# EAGLE board Sno_Shoe-Panel (EAGLE 9.6.2), part 1 of 4
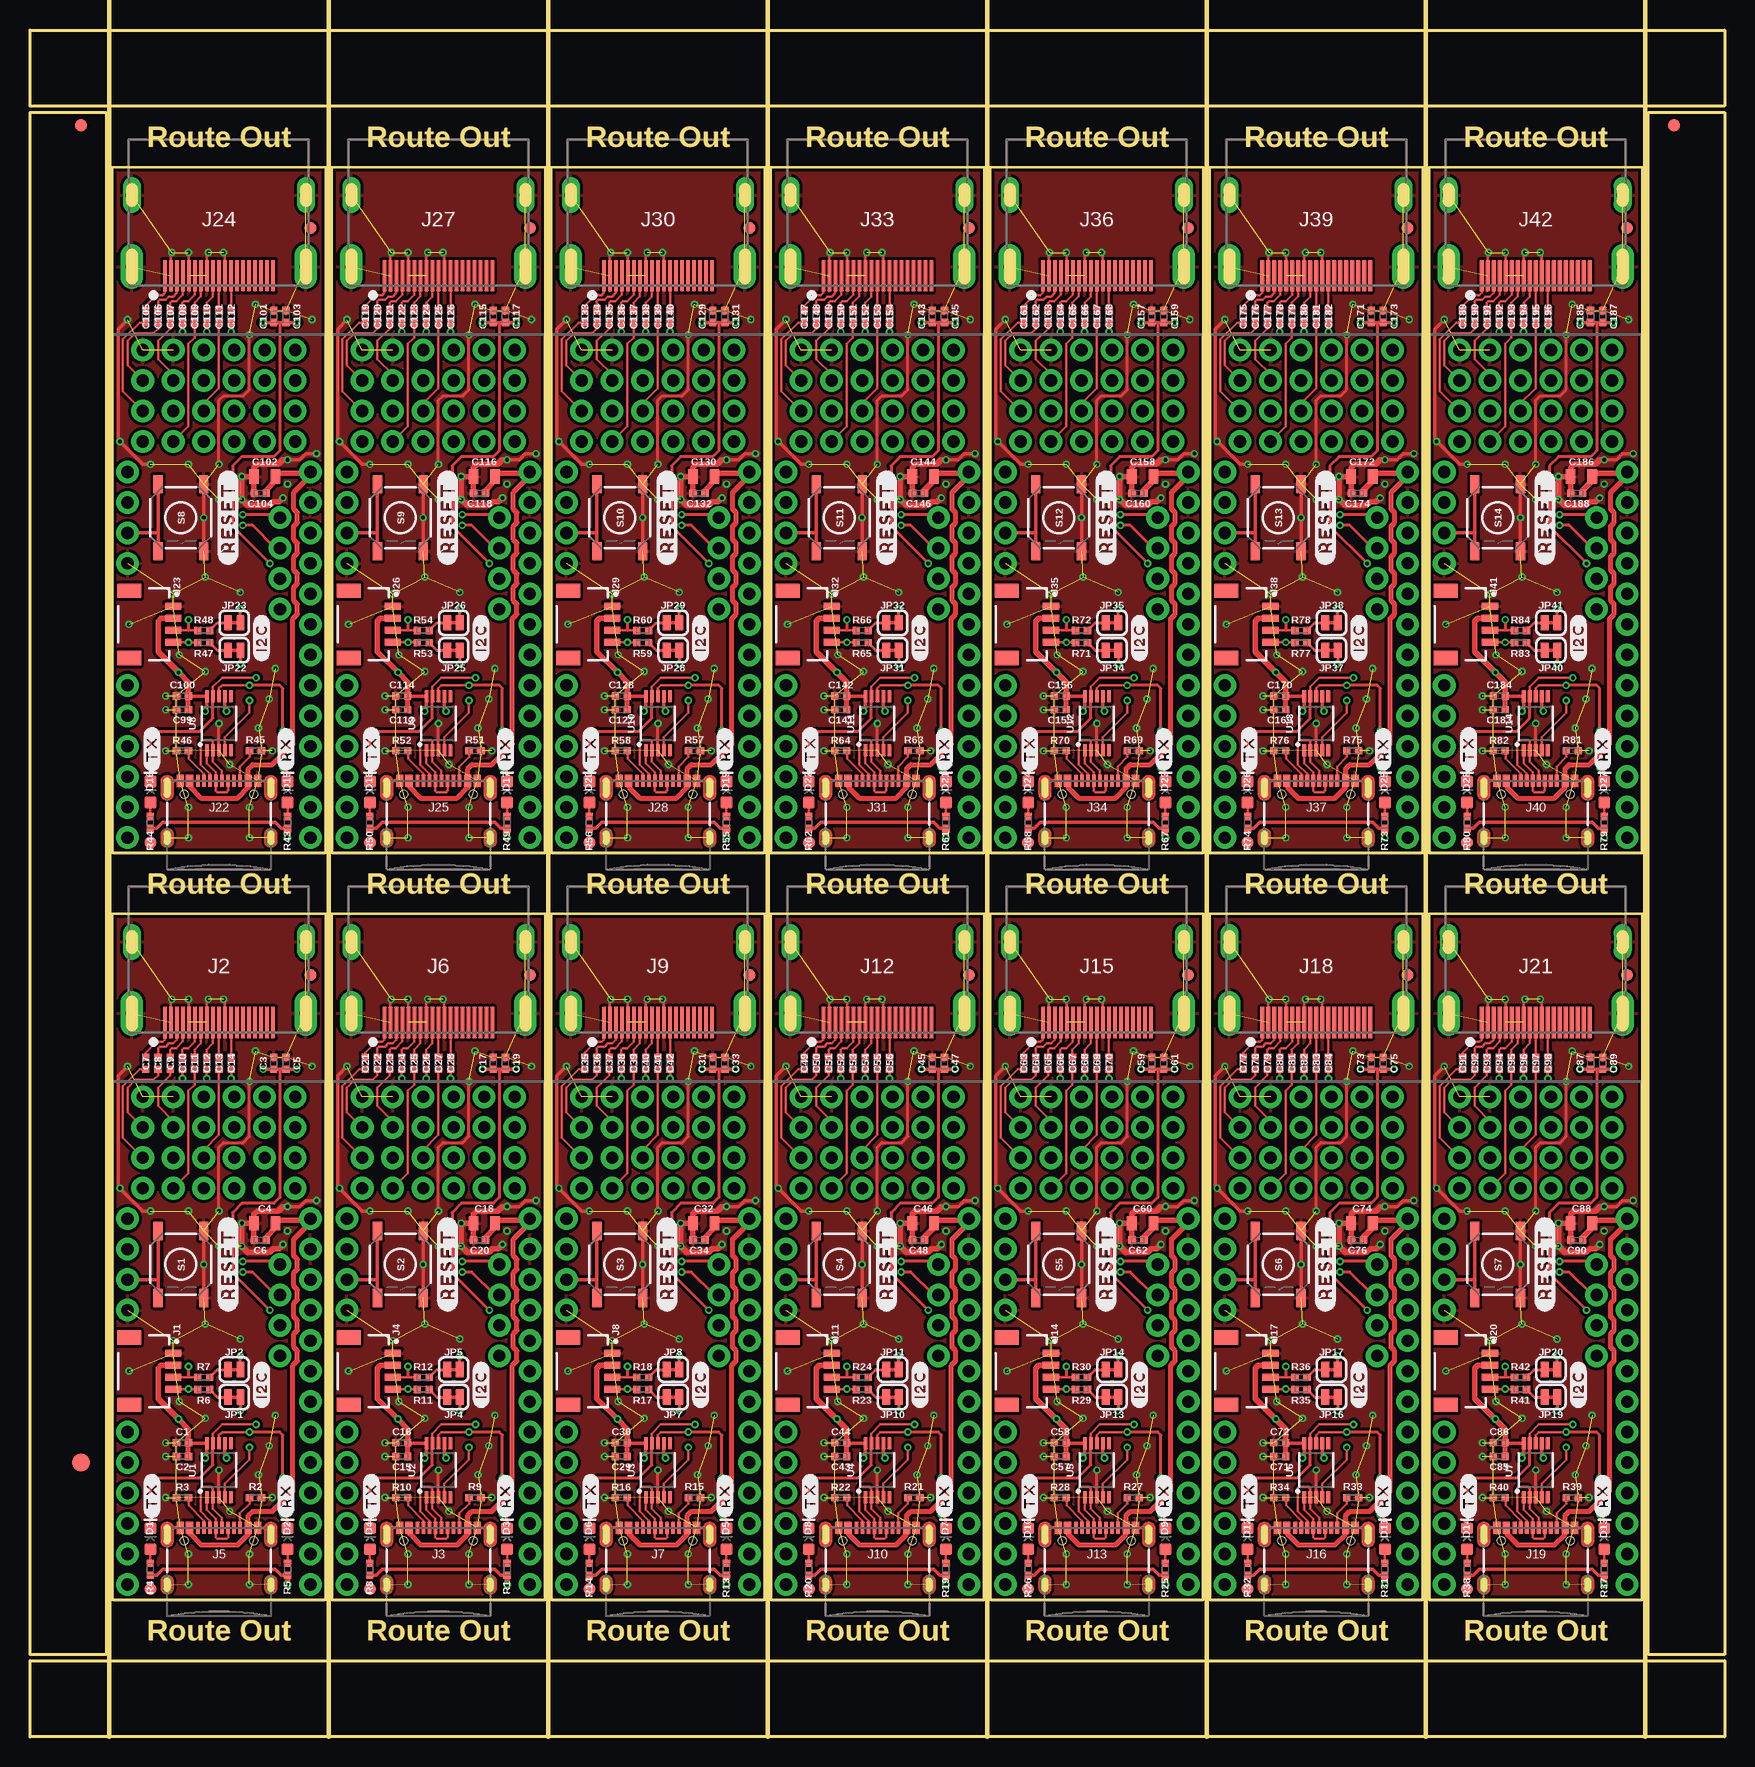
[diagram p0: board, top side]
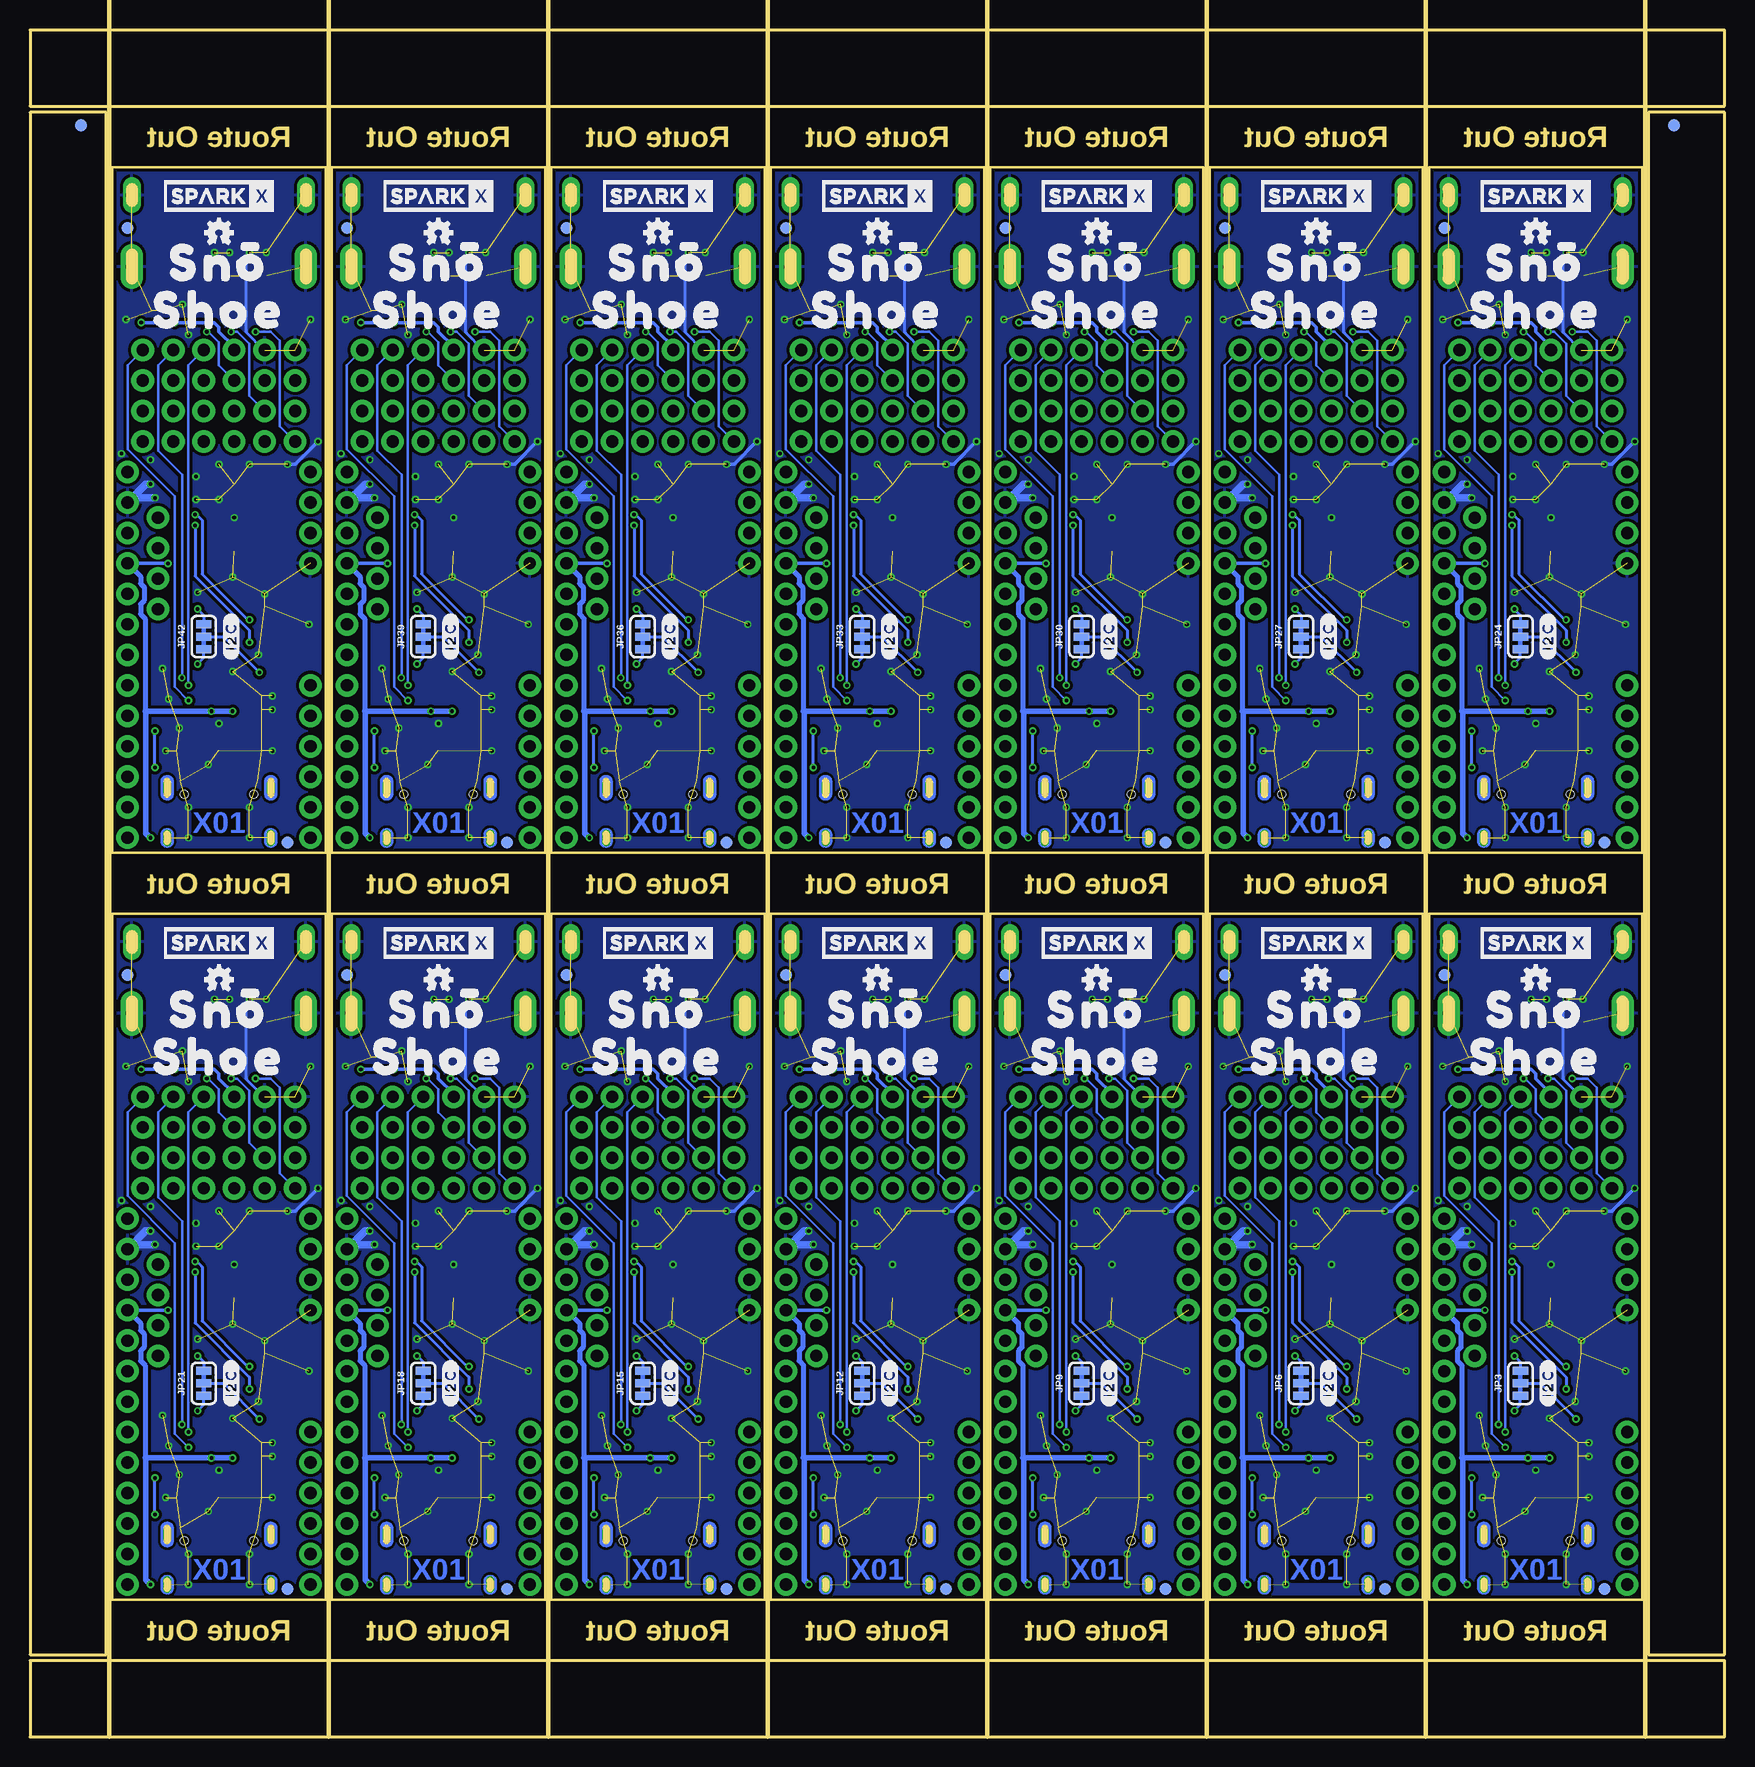
[diagram p1: board, bottom side, seen from below]

Size 141.22 x 142.24 mm. Coordinates in mm from the lower left corner, seen from the top.
Outline: 6.86,11.43 24.64,11.43 24.64,68.58 6.86,68.58 6.86,11.43
Outline: 25.15,11.43 42.93,11.43 42.93,68.58 25.15,68.58 25.15,11.43
Outline: 43.43,11.43 61.21,11.43 61.21,68.58 43.43,68.58 43.43,11.43
Outline: 61.72,11.43 79.5,11.43 79.5,68.58 61.72,68.58 61.72,11.43
Outline: 80.01,11.43 97.79,11.43 97.79,68.58 80.01,68.58 80.01,11.43
Outline: 98.3,11.43 116.08,11.43 116.08,68.58 98.3,68.58 98.3,11.43
Outline: 116.59,11.43 134.37,11.43 134.37,68.58 116.59,68.58 116.59,11.43
Outline: 6.86,73.66 24.64,73.66 24.64,130.81 6.86,130.81 6.86,73.66
Outline: 25.15,73.66 42.93,73.66 42.93,130.81 25.15,130.81 25.15,73.66
Outline: 43.43,73.66 61.21,73.66 61.21,130.81 43.43,130.81 43.43,73.66
Outline: 61.72,73.66 79.5,73.66 79.5,130.81 61.72,130.81 61.72,73.66
Outline: 80.01,73.66 97.79,73.66 97.79,130.81 80.01,130.81 80.01,73.66
Outline: 98.3,73.66 116.08,73.66 116.08,130.81 98.3,130.81 98.3,73.66
Outline: 116.59,73.66 134.37,73.66 134.37,130.81 116.59,130.81 116.59,73.66
Outline: 0,6.35 141.22,6.35 141.22,0 0,0 0,6.35
Outline: 134.87,135.38 141.22,135.38 141.22,6.86 134.87,6.86 134.87,135.38
Outline: 0,142.24 141.22,142.24 141.22,135.89 0,135.89 0,142.24
Outline: 0,135.38 6.35,135.38 6.35,6.86 0,6.86 0,135.38
Copper layers (1*16): Top 0.035mm / dielectric 1.5mm / Bottom 0.035mm
Design rules "Sno_Shoe": minimum track width 6mil, minimum drill 0.3mm, track to track 6mil, track to pad 6mil, pad to pad 6mil, via to via 6mil, smd to smd 6mil, copper to edge 6mil, drill to drill 6mil, minimum pad ring 6mil, minimum via ring 6mil, stop-mask expansion 4mil, vias tented up to drill 25mil, thermal gap 10mil
Net classes: 1 Power: width 0.406 mm
Milling: 8 lines

## Footprints (pad centres in the part's own frame; a part is rotated, then mirrored left to right if it is on the bottom)
0402-TIGHT = smd 0.6 x 0.6: 1 -0.5,0; 2 0.5,0
0805 = smd 0.8 x 1.2: 1 -0.9,0; 2 0.9,0
LED-0603 = smd 1 x 1: A -0.877,0; C 0.877,0
FIDUCIAL-1X2 = smd 1 x 1: 1 0,0
FIDUCIAL-1.5X3 = smd 1.5 x 1.5: 1 0,0
JST04_1MM_RA = smd 0.6 x 1.35: 1 -1.5,0; 2 -0.5,0; 3 0.5,0; 4 1.5,0 | smd 1.2 x 2: NC1 2.8,-3.675; NC2 -2.8,-3.675
MOLEX_HDMI_208658-1051 = smd 0.3 x 2.6: 1 4.5,5.235; 2 4,5.235; 3 3.5,5.235; 4 3,5.235; 5 2.5,5.235; 6 2,5.235; 7 1.5,5.235; 8 1,5.235; 9 0.5,5.235; 10 0,5.235; 11 -0.5,5.235; 12 -1,5.235; 13 -1.5,5.235; 14 -2,5.235; 15 -2.5,5.235; 16 -3,5.235; 17 -3.5,5.235; 18 -4,5.235; 19 -4.5,5.235 | drill 1 pad 1.875 long: MH1 -7.25,4.475; MH2 7.25,4.475 | drill 1 long: MH3 -7.25,-1.485; MH4 7.25,-1.485
USB-C-16P_4LAYER-PADS = smd 0.3 x 1: A5 -1.25,-0.34; A6 -0.25,-0.34; A7 0.25,-0.34; A8 1.25,-0.34; B5 1.75,-0.34; B6 0.75,-0.34; B7 -0.75,-0.34; B8 -1.75,-0.34 | smd 0.6 x 1: GND -3.225,-0.34; GND2 3.225,-0.34; VBUS1 -2.45,-0.34; VBUS2 2.45,-0.34 | drill 0.4 pad 0.6 long: SHLD1 -4.318,-0.915; SHLD2 4.318,-0.915; SHLD3 -4.318,-5.095; SHLD4 4.318,-5.095 | hole 0.65: -2.89,-1.445; 2.89,-1.445
SMT-JUMPER_2_NC_TRACE_SILK = smd 0.66 x 1.27: 1 -0.521,0; 2 0.521,0
SMT-JUMPER_3_2-NC_TRACE_SILK = smd 0.66 x 1.27: 1 -1.041,0; 2 0,0; 3 1.041,0
TACTILE_SWITCH_SMD_5.2MM = smd 1.524 x 0.762: 1 -2.794,1.905; 2 2.794,1.905; 3 -2.794,-1.905; 4 2.794,-1.905
MSOP10 = smd 1 x 0.3: 1 -2.25,1; 2 -2.25,0.5; 3 -2.25,0; 4 -2.25,-0.5; 5 -2.25,-1; 6 2.25,-1; 7 2.25,-0.5; 8 2.25,0; 9 2.25,0.5; 10 2.25,1
SNO_MISSING_PINS = drill 1.016 pad 1.88: P$1 10.16,7.62; P$2 7.62,7.62; P$3 5.08,7.62; P$4 2.54,7.62; P$8 -7.62,7.62; P$9 -10.16,7.62; P$10 -12.7,7.62; P$11 -15.24,7.62; P$12 -17.78,7.62; P$13 -20.32,7.62; P$19 -20.32,-7.62; P$20 -17.78,-7.62; P$21 -15.24,-7.62; P$22 -12.7,-7.62; P$23 -10.16,-7.62; P$24 -7.62,-7.62; P$25 -5.08,-7.62; P$26 -2.54,-7.62; P$27 0,-7.62; P$28 2.54,-7.62; P$29 5.08,-7.62; P$30 7.62,-7.62; P$31 10.16,-7.62; P$32 -1.27,-5.08; P$33 1.27,-5.08; P$34 3.81,-5.08; P$35 6.35,-5.08; P$36 12.7,6.35; P$37 12.7,3.81; P$38 12.7,1.27; P$39 12.7,-1.27; P$40 12.7,-3.81; P$41 12.7,-6.35; P$42 15.24,6.35; P$43 15.24,3.81; P$44 15.24,1.27; P$45 15.24,-1.27; P$46 15.24,-3.81; P$47 15.24,-6.35; P$48 17.78,6.35; P$49 17.78,3.81; P$50 17.78,1.27; P$51 17.78,-1.27; P$52 17.78,-3.81; P$53 17.78,-6.35; P$54 20.32,6.35; P$55 20.32,3.81; P$56 20.32,1.27; P$57 20.32,-1.27; P$58 20.32,-3.81; P$59 20.32,-6.35

## Placement (x,y rotation side)
C1  0.1uF  [0402-TIGHT]  12.7,24.51 180 top
C2  10nF  [0402-TIGHT]  12.7,23.37 180 top
C3  10uF  [0402-TIGHT]  20.32,56.13 90 top
C4  10uF  [0805]  19.56,42.8 180 top
C5  0.1uF  [0402-TIGHT]  21.34,56.13 90 top
C6  0.1uF  [0402-TIGHT]  19.18,41.4 180 top
C7  0.1uF  [0402-TIGHT]  9.65,56.13 90 top
C8  0.1uF  [0402-TIGHT]  10.67,56.13 90 top
C9  0.1uF  [0402-TIGHT]  11.68,56.13 90 top
C10  0.1uF  [0402-TIGHT]  12.7,56.13 90 top
C11  0.1uF  [0402-TIGHT]  13.72,56.13 90 top
C12  0.1uF  [0402-TIGHT]  14.73,56.13 90 top
C13  0.1uF  [0402-TIGHT]  15.75,56.13 90 top
C14  0.1uF  [0402-TIGHT]  16.76,56.13 90 top
C15  10nF  [0402-TIGHT]  30.99,23.37 180 top
C16  0.1uF  [0402-TIGHT]  30.99,24.51 180 top
C17  10uF  [0402-TIGHT]  38.61,56.13 90 top
C18  10uF  [0805]  37.85,42.8 180 top
C19  0.1uF  [0402-TIGHT]  39.62,56.13 90 top
C20  0.1uF  [0402-TIGHT]  37.46,41.4 180 top
C21  0.1uF  [0402-TIGHT]  27.94,56.13 90 top
C22  0.1uF  [0402-TIGHT]  28.96,56.13 90 top
C23  0.1uF  [0402-TIGHT]  29.97,56.13 90 top
C24  0.1uF  [0402-TIGHT]  30.99,56.13 90 top
C25  0.1uF  [0402-TIGHT]  32,56.13 90 top
C26  0.1uF  [0402-TIGHT]  33.02,56.13 90 top
C27  0.1uF  [0402-TIGHT]  34.04,56.13 90 top
C28  0.1uF  [0402-TIGHT]  35.05,56.13 90 top
C29  10nF  [0402-TIGHT]  49.28,23.37 180 top
C30  0.1uF  [0402-TIGHT]  49.28,24.51 180 top
C31  10uF  [0402-TIGHT]  56.9,56.13 90 top
C32  10uF  [0805]  56.13,42.8 180 top
C33  0.1uF  [0402-TIGHT]  57.91,56.13 90 top
C34  0.1uF  [0402-TIGHT]  55.75,41.4 180 top
C35  0.1uF  [0402-TIGHT]  46.23,56.13 90 top
C36  0.1uF  [0402-TIGHT]  47.24,56.13 90 top
C37  0.1uF  [0402-TIGHT]  48.26,56.13 90 top
C38  0.1uF  [0402-TIGHT]  49.28,56.13 90 top
C39  0.1uF  [0402-TIGHT]  50.29,56.13 90 top
C40  0.1uF  [0402-TIGHT]  51.31,56.13 90 top
C41  0.1uF  [0402-TIGHT]  52.32,56.13 90 top
C42  0.1uF  [0402-TIGHT]  53.34,56.13 90 top
C43  10nF  [0402-TIGHT]  67.56,23.37 180 top
C44  0.1uF  [0402-TIGHT]  67.56,24.51 180 top
C45  10uF  [0402-TIGHT]  75.18,56.13 90 top
C46  10uF  [0805]  74.42,42.8 180 top
C47  0.1uF  [0402-TIGHT]  76.2,56.13 90 top
C48  0.1uF  [0402-TIGHT]  74.04,41.4 180 top
C49  0.1uF  [0402-TIGHT]  64.52,56.13 90 top
C50  0.1uF  [0402-TIGHT]  65.53,56.13 90 top
C51  0.1uF  [0402-TIGHT]  66.55,56.13 90 top
C52  0.1uF  [0402-TIGHT]  67.56,56.13 90 top
C53  0.1uF  [0402-TIGHT]  68.58,56.13 90 top
C54  0.1uF  [0402-TIGHT]  69.6,56.13 90 top
C55  0.1uF  [0402-TIGHT]  70.61,56.13 90 top
C56  0.1uF  [0402-TIGHT]  71.63,56.13 90 top
C57  10nF  [0402-TIGHT]  85.85,23.37 180 top
C58  0.1uF  [0402-TIGHT]  85.85,24.51 180 top
C59  10uF  [0402-TIGHT]  93.47,56.13 90 top
C60  10uF  [0805]  92.71,42.8 180 top
C61  0.1uF  [0402-TIGHT]  94.49,56.13 90 top
C62  0.1uF  [0402-TIGHT]  92.33,41.4 180 top
C63  0.1uF  [0402-TIGHT]  82.8,56.13 90 top
C64  0.1uF  [0402-TIGHT]  83.82,56.13 90 top
C65  0.1uF  [0402-TIGHT]  84.84,56.13 90 top
C66  0.1uF  [0402-TIGHT]  85.85,56.13 90 top
C67  0.1uF  [0402-TIGHT]  86.87,56.13 90 top
C68  0.1uF  [0402-TIGHT]  87.88,56.13 90 top
C69  0.1uF  [0402-TIGHT]  88.9,56.13 90 top
C70  0.1uF  [0402-TIGHT]  89.92,56.13 90 top
C71  10nF  [0402-TIGHT]  104.14,23.37 180 top
C72  0.1uF  [0402-TIGHT]  104.14,24.51 180 top
C73  10uF  [0402-TIGHT]  111.76,56.13 90 top
C74  10uF  [0805]  111,42.8 180 top
C75  0.1uF  [0402-TIGHT]  112.78,56.13 90 top
C76  0.1uF  [0402-TIGHT]  110.62,41.4 180 top
C77  0.1uF  [0402-TIGHT]  101.09,56.13 90 top
C78  0.1uF  [0402-TIGHT]  102.11,56.13 90 top
C79  0.1uF  [0402-TIGHT]  103.12,56.13 90 top
C80  0.1uF  [0402-TIGHT]  104.14,56.13 90 top
C81  0.1uF  [0402-TIGHT]  105.16,56.13 90 top
C82  0.1uF  [0402-TIGHT]  106.17,56.13 90 top
C83  0.1uF  [0402-TIGHT]  107.19,56.13 90 top
C84  0.1uF  [0402-TIGHT]  108.2,56.13 90 top
C85  10nF  [0402-TIGHT]  122.43,23.37 180 top
C86  0.1uF  [0402-TIGHT]  122.43,24.51 180 top
C87  10uF  [0402-TIGHT]  130.05,56.13 90 top
C88  10uF  [0805]  129.29,42.8 180 top
C89  0.1uF  [0402-TIGHT]  131.06,56.13 90 top
C90  0.1uF  [0402-TIGHT]  128.91,41.4 180 top
C91  0.1uF  [0402-TIGHT]  119.38,56.13 90 top
C92  0.1uF  [0402-TIGHT]  120.4,56.13 90 top
C93  0.1uF  [0402-TIGHT]  121.41,56.13 90 top
C94  0.1uF  [0402-TIGHT]  122.43,56.13 90 top
C95  0.1uF  [0402-TIGHT]  123.44,56.13 90 top
C96  0.1uF  [0402-TIGHT]  124.46,56.13 90 top
C97  0.1uF  [0402-TIGHT]  125.48,56.13 90 top
C98  0.1uF  [0402-TIGHT]  126.49,56.13 90 top
C99  10nF  [0402-TIGHT]  12.7,85.6 180 top
C100  0.1uF  [0402-TIGHT]  12.7,86.74 180 top
C101  10uF  [0402-TIGHT]  20.32,118.36 90 top
C102  10uF  [0805]  19.56,105.03 180 top
C103  0.1uF  [0402-TIGHT]  21.34,118.36 90 top
C104  0.1uF  [0402-TIGHT]  19.18,103.63 180 top
C105  0.1uF  [0402-TIGHT]  9.65,118.36 90 top
C106  0.1uF  [0402-TIGHT]  10.67,118.36 90 top
C107  0.1uF  [0402-TIGHT]  11.68,118.36 90 top
C108  0.1uF  [0402-TIGHT]  12.7,118.36 90 top
C109  0.1uF  [0402-TIGHT]  13.72,118.36 90 top
C110  0.1uF  [0402-TIGHT]  14.73,118.36 90 top
C111  0.1uF  [0402-TIGHT]  15.75,118.36 90 top
C112  0.1uF  [0402-TIGHT]  16.76,118.36 90 top
C113  10nF  [0402-TIGHT]  30.99,85.6 180 top
C114  0.1uF  [0402-TIGHT]  30.99,86.74 180 top
C115  10uF  [0402-TIGHT]  38.61,118.36 90 top
C116  10uF  [0805]  37.85,105.03 180 top
C117  0.1uF  [0402-TIGHT]  39.62,118.36 90 top
C118  0.1uF  [0402-TIGHT]  37.46,103.63 180 top
C119  0.1uF  [0402-TIGHT]  27.94,118.36 90 top
C120  0.1uF  [0402-TIGHT]  28.96,118.36 90 top
C121  0.1uF  [0402-TIGHT]  29.97,118.36 90 top
C122  0.1uF  [0402-TIGHT]  30.99,118.36 90 top
C123  0.1uF  [0402-TIGHT]  32,118.36 90 top
C124  0.1uF  [0402-TIGHT]  33.02,118.36 90 top
C125  0.1uF  [0402-TIGHT]  34.04,118.36 90 top
C126  0.1uF  [0402-TIGHT]  35.05,118.36 90 top
C127  10nF  [0402-TIGHT]  49.28,85.6 180 top
C128  0.1uF  [0402-TIGHT]  49.28,86.74 180 top
C129  10uF  [0402-TIGHT]  56.9,118.36 90 top
C130  10uF  [0805]  56.13,105.03 180 top
C131  0.1uF  [0402-TIGHT]  57.91,118.36 90 top
C132  0.1uF  [0402-TIGHT]  55.75,103.63 180 top
C133  0.1uF  [0402-TIGHT]  46.23,118.36 90 top
C134  0.1uF  [0402-TIGHT]  47.24,118.36 90 top
C135  0.1uF  [0402-TIGHT]  48.26,118.36 90 top
C136  0.1uF  [0402-TIGHT]  49.28,118.36 90 top
C137  0.1uF  [0402-TIGHT]  50.29,118.36 90 top
C138  0.1uF  [0402-TIGHT]  51.31,118.36 90 top
C139  0.1uF  [0402-TIGHT]  52.32,118.36 90 top
C140  0.1uF  [0402-TIGHT]  53.34,118.36 90 top
C141  10nF  [0402-TIGHT]  67.56,85.6 180 top
C142  0.1uF  [0402-TIGHT]  67.56,86.74 180 top
C143  10uF  [0402-TIGHT]  75.18,118.36 90 top
C144  10uF  [0805]  74.42,105.03 180 top
C145  0.1uF  [0402-TIGHT]  76.2,118.36 90 top
C146  0.1uF  [0402-TIGHT]  74.04,103.63 180 top
C147  0.1uF  [0402-TIGHT]  64.52,118.36 90 top
C148  0.1uF  [0402-TIGHT]  65.53,118.36 90 top
C149  0.1uF  [0402-TIGHT]  66.55,118.36 90 top
C150  0.1uF  [0402-TIGHT]  67.56,118.36 90 top
C151  0.1uF  [0402-TIGHT]  68.58,118.36 90 top
C152  0.1uF  [0402-TIGHT]  69.6,118.36 90 top
C153  0.1uF  [0402-TIGHT]  70.61,118.36 90 top
C154  0.1uF  [0402-TIGHT]  71.63,118.36 90 top
C155  10nF  [0402-TIGHT]  85.85,85.6 180 top
C156  0.1uF  [0402-TIGHT]  85.85,86.74 180 top
C157  10uF  [0402-TIGHT]  93.47,118.36 90 top
C158  10uF  [0805]  92.71,105.03 180 top
C159  0.1uF  [0402-TIGHT]  94.49,118.36 90 top
C160  0.1uF  [0402-TIGHT]  92.33,103.63 180 top
C161  0.1uF  [0402-TIGHT]  82.8,118.36 90 top
C162  0.1uF  [0402-TIGHT]  83.82,118.36 90 top
C163  0.1uF  [0402-TIGHT]  84.84,118.36 90 top
C164  0.1uF  [0402-TIGHT]  85.85,118.36 90 top
C165  0.1uF  [0402-TIGHT]  86.87,118.36 90 top
C166  0.1uF  [0402-TIGHT]  87.88,118.36 90 top
C167  0.1uF  [0402-TIGHT]  88.9,118.36 90 top
C168  0.1uF  [0402-TIGHT]  89.92,118.36 90 top
C169  10nF  [0402-TIGHT]  104.14,85.6 180 top
C170  0.1uF  [0402-TIGHT]  104.14,86.74 180 top
C171  10uF  [0402-TIGHT]  111.76,118.36 90 top
C172  10uF  [0805]  111,105.03 180 top
C173  0.1uF  [0402-TIGHT]  112.78,118.36 90 top
C174  0.1uF  [0402-TIGHT]  110.62,103.63 180 top
C175  0.1uF  [0402-TIGHT]  101.09,118.36 90 top
C176  0.1uF  [0402-TIGHT]  102.11,118.36 90 top
C177  0.1uF  [0402-TIGHT]  103.12,118.36 90 top
C178  0.1uF  [0402-TIGHT]  104.14,118.36 90 top
C179  0.1uF  [0402-TIGHT]  105.16,118.36 90 top
C180  0.1uF  [0402-TIGHT]  106.17,118.36 90 top
C181  0.1uF  [0402-TIGHT]  107.19,118.36 90 top
C182  0.1uF  [0402-TIGHT]  108.2,118.36 90 top
C183  10nF  [0402-TIGHT]  122.43,85.6 180 top
C184  0.1uF  [0402-TIGHT]  122.43,86.74 180 top
C185  10uF  [0402-TIGHT]  130.05,118.36 90 top
C186  10uF  [0805]  129.29,105.03 180 top
C187  0.1uF  [0402-TIGHT]  131.06,118.36 90 top
C188  0.1uF  [0402-TIGHT]  128.91,103.63 180 top
C189  0.1uF  [0402-TIGHT]  119.38,118.36 90 top
C190  0.1uF  [0402-TIGHT]  120.4,118.36 90 top
C191  0.1uF  [0402-TIGHT]  121.41,118.36 90 top
C192  0.1uF  [0402-TIGHT]  122.43,118.36 90 top
C193  0.1uF  [0402-TIGHT]  123.44,118.36 90 top
C194  0.1uF  [0402-TIGHT]  124.46,118.36 90 top
C195  0.1uF  [0402-TIGHT]  125.48,118.36 90 top
C196  0.1uF  [0402-TIGHT]  126.49,118.36 90 top
D1  GREEN  [LED-0603]  10.03,16.51 90 top
D2  Yellow  [LED-0603]  21.46,16.51 90 top
D3  Yellow  [LED-0603]  39.75,16.51 90 top
D4  GREEN  [LED-0603]  28.32,16.51 90 top
D5  Yellow  [LED-0603]  58.04,16.51 90 top
D6  GREEN  [LED-0603]  46.61,16.51 90 top
D7  Yellow  [LED-0603]  76.33,16.51 90 top
D8  GREEN  [LED-0603]  64.9,16.51 90 top
D9  Yellow  [LED-0603]  94.62,16.51 90 top
D10  GREEN  [LED-0603]  83.19,16.51 90 top
D11  Yellow  [LED-0603]  112.9,16.51 90 top
D12  GREEN  [LED-0603]  101.47,16.51 90 top
D13  Yellow  [LED-0603]  131.19,16.51 90 top
D14  GREEN  [LED-0603]  119.76,16.51 90 top
D15  Yellow  [LED-0603]  21.46,78.74 90 top
D16  GREEN  [LED-0603]  10.03,78.74 90 top
D17  Yellow  [LED-0603]  39.75,78.74 90 top
D18  GREEN  [LED-0603]  28.32,78.74 90 top
D19  Yellow  [LED-0603]  58.04,78.74 90 top
D20  GREEN  [LED-0603]  46.61,78.74 90 top
D21  Yellow  [LED-0603]  76.33,78.74 90 top
D22  GREEN  [LED-0603]  64.9,78.74 90 top
D23  Yellow  [LED-0603]  94.62,78.74 90 top
D24  GREEN  [LED-0603]  83.19,78.74 90 top
D25  Yellow  [LED-0603]  112.9,78.74 90 top
D26  GREEN  [LED-0603]  101.47,78.74 90 top
D27  Yellow  [LED-0603]  131.19,78.74 90 top
D28  GREEN  [LED-0603]  119.76,78.74 90 top
E$1  [FIDUCIAL-1X2]  4.23,134.3 0 top
E$2  [FIDUCIAL-1X2]  4.23,134.3 0 bottom
E$3  [FIDUCIAL-1X2]  136.99,134.3 0 top
E$4  [FIDUCIAL-1X2]  136.99,134.3 0 bottom
E$5  [FIDUCIAL-1.5X3]  4.23,22.86 0 top
FD1  FIDUCIAL1X2  [FIDUCIAL-1X2]  23.37,63.5 0 top
FD2  FIDUCIAL1X2  [FIDUCIAL-1X2]  10.03,12.32 0 top
FD3  FIDUCIAL1X2  [FIDUCIAL-1X2]  23.37,63.5 0 bottom
FD4  FIDUCIAL1X2  [FIDUCIAL-1X2]  10.03,12.32 0 bottom
FD5  FIDUCIAL1X2  [FIDUCIAL-1X2]  41.66,63.5 0 top
FD6  FIDUCIAL1X2  [FIDUCIAL-1X2]  28.32,12.32 0 top
FD7  FIDUCIAL1X2  [FIDUCIAL-1X2]  41.66,63.5 0 bottom
FD8  FIDUCIAL1X2  [FIDUCIAL-1X2]  28.32,12.32 0 bottom
FD9  FIDUCIAL1X2  [FIDUCIAL-1X2]  59.94,63.5 0 top
FD10  FIDUCIAL1X2  [FIDUCIAL-1X2]  46.61,12.32 0 top
FD11  FIDUCIAL1X2  [FIDUCIAL-1X2]  59.94,63.5 0 bottom
FD12  FIDUCIAL1X2  [FIDUCIAL-1X2]  46.61,12.32 0 bottom
FD13  FIDUCIAL1X2  [FIDUCIAL-1X2]  78.23,63.5 0 top
FD14  FIDUCIAL1X2  [FIDUCIAL-1X2]  64.9,12.32 0 top
FD15  FIDUCIAL1X2  [FIDUCIAL-1X2]  78.23,63.5 0 bottom
FD16  FIDUCIAL1X2  [FIDUCIAL-1X2]  64.9,12.32 0 bottom
FD17  FIDUCIAL1X2  [FIDUCIAL-1X2]  96.52,63.5 0 top
FD18  FIDUCIAL1X2  [FIDUCIAL-1X2]  83.19,12.32 0 top
FD19  FIDUCIAL1X2  [FIDUCIAL-1X2]  96.52,63.5 0 bottom
FD20  FIDUCIAL1X2  [FIDUCIAL-1X2]  83.19,12.32 0 bottom
FD21  FIDUCIAL1X2  [FIDUCIAL-1X2]  114.81,63.5 0 top
FD22  FIDUCIAL1X2  [FIDUCIAL-1X2]  101.47,12.32 0 top
FD23  FIDUCIAL1X2  [FIDUCIAL-1X2]  114.81,63.5 0 bottom
FD24  FIDUCIAL1X2  [FIDUCIAL-1X2]  101.47,12.32 0 bottom
FD25  FIDUCIAL1X2  [FIDUCIAL-1X2]  133.1,63.5 0 top
FD26  FIDUCIAL1X2  [FIDUCIAL-1X2]  119.76,12.32 0 top
FD27  FIDUCIAL1X2  [FIDUCIAL-1X2]  133.1,63.5 0 bottom
FD28  FIDUCIAL1X2  [FIDUCIAL-1X2]  119.76,12.32 0 bottom
FD29  FIDUCIAL1X2  [FIDUCIAL-1X2]  23.37,125.73 0 top
FD30  FIDUCIAL1X2  [FIDUCIAL-1X2]  10.03,74.55 0 top
FD31  FIDUCIAL1X2  [FIDUCIAL-1X2]  23.37,125.73 0 bottom
FD32  FIDUCIAL1X2  [FIDUCIAL-1X2]  10.03,74.55 0 bottom
FD33  FIDUCIAL1X2  [FIDUCIAL-1X2]  41.66,125.73 0 top
FD34  FIDUCIAL1X2  [FIDUCIAL-1X2]  28.32,74.55 0 top
FD35  FIDUCIAL1X2  [FIDUCIAL-1X2]  41.66,125.73 0 bottom
FD36  FIDUCIAL1X2  [FIDUCIAL-1X2]  28.32,74.55 0 bottom
FD37  FIDUCIAL1X2  [FIDUCIAL-1X2]  59.94,125.73 0 top
FD38  FIDUCIAL1X2  [FIDUCIAL-1X2]  46.61,74.55 0 top
FD39  FIDUCIAL1X2  [FIDUCIAL-1X2]  59.94,125.73 0 bottom
FD40  FIDUCIAL1X2  [FIDUCIAL-1X2]  46.61,74.55 0 bottom
FD41  FIDUCIAL1X2  [FIDUCIAL-1X2]  78.23,125.73 0 top
FD42  FIDUCIAL1X2  [FIDUCIAL-1X2]  64.9,74.55 0 top
FD43  FIDUCIAL1X2  [FIDUCIAL-1X2]  78.23,125.73 0 bottom
FD44  FIDUCIAL1X2  [FIDUCIAL-1X2]  64.9,74.55 0 bottom
FD45  FIDUCIAL1X2  [FIDUCIAL-1X2]  96.52,125.73 0 top
FD46  FIDUCIAL1X2  [FIDUCIAL-1X2]  83.19,74.55 0 top
FD47  FIDUCIAL1X2  [FIDUCIAL-1X2]  96.52,125.73 0 bottom
FD48  FIDUCIAL1X2  [FIDUCIAL-1X2]  83.19,74.55 0 bottom
FD49  FIDUCIAL1X2  [FIDUCIAL-1X2]  114.81,125.73 0 top
FD50  FIDUCIAL1X2  [FIDUCIAL-1X2]  101.47,74.55 0 top
FD51  FIDUCIAL1X2  [FIDUCIAL-1X2]  114.81,125.73 0 bottom
FD52  FIDUCIAL1X2  [FIDUCIAL-1X2]  101.47,74.55 0 bottom
FD53  FIDUCIAL1X2  [FIDUCIAL-1X2]  133.1,125.73 0 top
FD54  FIDUCIAL1X2  [FIDUCIAL-1X2]  119.76,74.55 0 top
FD55  FIDUCIAL1X2  [FIDUCIAL-1X2]  133.1,125.73 0 bottom
FD56  FIDUCIAL1X2  [FIDUCIAL-1X2]  119.76,74.55 0 bottom
J1  QWIIC_RIGHT_ANGLE  [JST04_1MM_RA]  11.94,30.48 270 top
J2  MOLEX_HDMI_208658-1051  [MOLEX_HDMI_208658-1051]  15.75,64.77 180 top
J3  [USB-C-16P_4LAYER-PADS]  34.04,17.78 0 top
J4  QWIIC_RIGHT_ANGLE  [JST04_1MM_RA]  30.23,30.48 270 top
J5  [USB-C-16P_4LAYER-PADS]  15.75,17.78 0 top
J6  MOLEX_HDMI_208658-1051  [MOLEX_HDMI_208658-1051]  34.04,64.77 180 top
J7  [USB-C-16P_4LAYER-PADS]  52.32,17.78 0 top
J8  QWIIC_RIGHT_ANGLE  [JST04_1MM_RA]  48.51,30.48 270 top
J9  MOLEX_HDMI_208658-1051  [MOLEX_HDMI_208658-1051]  52.32,64.77 180 top
J10  [USB-C-16P_4LAYER-PADS]  70.61,17.78 0 top
J11  QWIIC_RIGHT_ANGLE  [JST04_1MM_RA]  66.8,30.48 270 top
J12  MOLEX_HDMI_208658-1051  [MOLEX_HDMI_208658-1051]  70.61,64.77 180 top
J13  [USB-C-16P_4LAYER-PADS]  88.9,17.78 0 top
J14  QWIIC_RIGHT_ANGLE  [JST04_1MM_RA]  85.09,30.48 270 top
J15  MOLEX_HDMI_208658-1051  [MOLEX_HDMI_208658-1051]  88.9,64.77 180 top
J16  [USB-C-16P_4LAYER-PADS]  107.19,17.78 0 top
J17  QWIIC_RIGHT_ANGLE  [JST04_1MM_RA]  103.38,30.48 270 top
J18  MOLEX_HDMI_208658-1051  [MOLEX_HDMI_208658-1051]  107.19,64.77 180 top
J19  [USB-C-16P_4LAYER-PADS]  125.48,17.78 0 top
J20  QWIIC_RIGHT_ANGLE  [JST04_1MM_RA]  121.67,30.48 270 top
J21  MOLEX_HDMI_208658-1051  [MOLEX_HDMI_208658-1051]  125.48,64.77 180 top
J22  [USB-C-16P_4LAYER-PADS]  15.75,80.01 0 top
J23  QWIIC_RIGHT_ANGLE  [JST04_1MM_RA]  11.94,92.71 270 top
J24  MOLEX_HDMI_208658-1051  [MOLEX_HDMI_208658-1051]  15.75,127 180 top
J25  [USB-C-16P_4LAYER-PADS]  34.04,80.01 0 top
J26  QWIIC_RIGHT_ANGLE  [JST04_1MM_RA]  30.23,92.71 270 top
J27  MOLEX_HDMI_208658-1051  [MOLEX_HDMI_208658-1051]  34.04,127 180 top
J28  [USB-C-16P_4LAYER-PADS]  52.32,80.01 0 top
J29  QWIIC_RIGHT_ANGLE  [JST04_1MM_RA]  48.51,92.71 270 top
J30  MOLEX_HDMI_208658-1051  [MOLEX_HDMI_208658-1051]  52.32,127 180 top
J31  [USB-C-16P_4LAYER-PADS]  70.61,80.01 0 top
J32  QWIIC_RIGHT_ANGLE  [JST04_1MM_RA]  66.8,92.71 270 top
J33  MOLEX_HDMI_208658-1051  [MOLEX_HDMI_208658-1051]  70.61,127 180 top
J34  [USB-C-16P_4LAYER-PADS]  88.9,80.01 0 top
J35  QWIIC_RIGHT_ANGLE  [JST04_1MM_RA]  85.09,92.71 270 top
J36  MOLEX_HDMI_208658-1051  [MOLEX_HDMI_208658-1051]  88.9,127 180 top
J37  [USB-C-16P_4LAYER-PADS]  107.19,80.01 0 top
J38  QWIIC_RIGHT_ANGLE  [JST04_1MM_RA]  103.38,92.71 270 top
J39  MOLEX_HDMI_208658-1051  [MOLEX_HDMI_208658-1051]  107.19,127 180 top
J40  [USB-C-16P_4LAYER-PADS]  125.48,80.01 0 top
J41  QWIIC_RIGHT_ANGLE  [JST04_1MM_RA]  121.67,92.71 270 top
J42  MOLEX_HDMI_208658-1051  [MOLEX_HDMI_208658-1051]  125.48,127 180 top
JP1  JUMPER-SMT_2_NC_TRACE_SILK  [SMT-JUMPER_2_NC_TRACE_SILK]  17.02,28.32 0 top
JP2  JUMPER-SMT_2_NC_TRACE_SILK  [SMT-JUMPER_2_NC_TRACE_SILK]  17.02,30.61 0 top
JP3  JUMPER-SMT_3_2-NC_TRACE_SILK  [SMT-JUMPER_3_2-NC_TRACE_SILK]  17.02,29.46 270 bottom
JP4  JUMPER-SMT_2_NC_TRACE_SILK  [SMT-JUMPER_2_NC_TRACE_SILK]  35.31,28.32 0 top
JP5  JUMPER-SMT_2_NC_TRACE_SILK  [SMT-JUMPER_2_NC_TRACE_SILK]  35.31,30.61 0 top
JP6  JUMPER-SMT_3_2-NC_TRACE_SILK  [SMT-JUMPER_3_2-NC_TRACE_SILK]  35.31,29.46 270 bottom
JP7  JUMPER-SMT_2_NC_TRACE_SILK  [SMT-JUMPER_2_NC_TRACE_SILK]  53.59,28.32 0 top
JP8  JUMPER-SMT_2_NC_TRACE_SILK  [SMT-JUMPER_2_NC_TRACE_SILK]  53.59,30.61 0 top
JP9  JUMPER-SMT_3_2-NC_TRACE_SILK  [SMT-JUMPER_3_2-NC_TRACE_SILK]  53.59,29.46 270 bottom
JP10  JUMPER-SMT_2_NC_TRACE_SILK  [SMT-JUMPER_2_NC_TRACE_SILK]  71.88,28.32 0 top
JP11  JUMPER-SMT_2_NC_TRACE_SILK  [SMT-JUMPER_2_NC_TRACE_SILK]  71.88,30.61 0 top
JP12  JUMPER-SMT_3_2-NC_TRACE_SILK  [SMT-JUMPER_3_2-NC_TRACE_SILK]  71.88,29.46 270 bottom
JP13  JUMPER-SMT_2_NC_TRACE_SILK  [SMT-JUMPER_2_NC_TRACE_SILK]  90.17,28.32 0 top
JP14  JUMPER-SMT_2_NC_TRACE_SILK  [SMT-JUMPER_2_NC_TRACE_SILK]  90.17,30.61 0 top
JP15  JUMPER-SMT_3_2-NC_TRACE_SILK  [SMT-JUMPER_3_2-NC_TRACE_SILK]  90.17,29.46 270 bottom
JP16  JUMPER-SMT_2_NC_TRACE_SILK  [SMT-JUMPER_2_NC_TRACE_SILK]  108.46,28.32 0 top
JP17  JUMPER-SMT_2_NC_TRACE_SILK  [SMT-JUMPER_2_NC_TRACE_SILK]  108.46,30.61 0 top
JP18  JUMPER-SMT_3_2-NC_TRACE_SILK  [SMT-JUMPER_3_2-NC_TRACE_SILK]  108.46,29.46 270 bottom
JP19  JUMPER-SMT_2_NC_TRACE_SILK  [SMT-JUMPER_2_NC_TRACE_SILK]  126.75,28.32 0 top
JP20  JUMPER-SMT_2_NC_TRACE_SILK  [SMT-JUMPER_2_NC_TRACE_SILK]  126.75,30.61 0 top
JP21  JUMPER-SMT_3_2-NC_TRACE_SILK  [SMT-JUMPER_3_2-NC_TRACE_SILK]  126.75,29.46 270 bottom
JP22  JUMPER-SMT_2_NC_TRACE_SILK  [SMT-JUMPER_2_NC_TRACE_SILK]  17.02,90.55 0 top
JP23  JUMPER-SMT_2_NC_TRACE_SILK  [SMT-JUMPER_2_NC_TRACE_SILK]  17.02,92.84 0 top
JP24  JUMPER-SMT_3_2-NC_TRACE_SILK  [SMT-JUMPER_3_2-NC_TRACE_SILK]  17.02,91.69 270 bottom
JP25  JUMPER-SMT_2_NC_TRACE_SILK  [SMT-JUMPER_2_NC_TRACE_SILK]  35.31,90.55 0 top
JP26  JUMPER-SMT_2_NC_TRACE_SILK  [SMT-JUMPER_2_NC_TRACE_SILK]  35.31,92.84 0 top
JP27  JUMPER-SMT_3_2-NC_TRACE_SILK  [SMT-JUMPER_3_2-NC_TRACE_SILK]  35.31,91.69 270 bottom
JP28  JUMPER-SMT_2_NC_TRACE_SILK  [SMT-JUMPER_2_NC_TRACE_SILK]  53.59,90.55 0 top
JP29  JUMPER-SMT_2_NC_TRACE_SILK  [SMT-JUMPER_2_NC_TRACE_SILK]  53.59,92.84 0 top
JP30  JUMPER-SMT_3_2-NC_TRACE_SILK  [SMT-JUMPER_3_2-NC_TRACE_SILK]  53.59,91.69 270 bottom
JP31  JUMPER-SMT_2_NC_TRACE_SILK  [SMT-JUMPER_2_NC_TRACE_SILK]  71.88,90.55 0 top
JP32  JUMPER-SMT_2_NC_TRACE_SILK  [SMT-JUMPER_2_NC_TRACE_SILK]  71.88,92.84 0 top
JP33  JUMPER-SMT_3_2-NC_TRACE_SILK  [SMT-JUMPER_3_2-NC_TRACE_SILK]  71.88,91.69 270 bottom
JP34  JUMPER-SMT_2_NC_TRACE_SILK  [SMT-JUMPER_2_NC_TRACE_SILK]  90.17,90.55 0 top
JP35  JUMPER-SMT_2_NC_TRACE_SILK  [SMT-JUMPER_2_NC_TRACE_SILK]  90.17,92.84 0 top
JP36  JUMPER-SMT_3_2-NC_TRACE_SILK  [SMT-JUMPER_3_2-NC_TRACE_SILK]  90.17,91.69 270 bottom
JP37  JUMPER-SMT_2_NC_TRACE_SILK  [SMT-JUMPER_2_NC_TRACE_SILK]  108.46,90.55 0 top
JP38  JUMPER-SMT_2_NC_TRACE_SILK  [SMT-JUMPER_2_NC_TRACE_SILK]  108.46,92.84 0 top
JP39  JUMPER-SMT_3_2-NC_TRACE_SILK  [SMT-JUMPER_3_2-NC_TRACE_SILK]  108.46,91.69 270 bottom
JP40  JUMPER-SMT_2_NC_TRACE_SILK  [SMT-JUMPER_2_NC_TRACE_SILK]  126.75,90.55 0 top
JP41  JUMPER-SMT_2_NC_TRACE_SILK  [SMT-JUMPER_2_NC_TRACE_SILK]  126.75,92.84 0 top
JP42  JUMPER-SMT_3_2-NC_TRACE_SILK  [SMT-JUMPER_3_2-NC_TRACE_SILK]  126.75,91.69 270 bottom
LOGO1  OSHW-LOGOMINI  [OSHW-LOGO-MINI]  34.04,63.12 0 bottom
LOGO2  OSHW-LOGOMINI  [OSHW-LOGO-MINI]  15.75,63.12 0 bottom
LOGO3  OSHW-LOGOMINI  [OSHW-LOGO-MINI]  52.32,63.12 0 bottom
LOGO4  OSHW-LOGOMINI  [OSHW-LOGO-MINI]  70.61,63.12 0 bottom
LOGO5  OSHW-LOGOMINI  [OSHW-LOGO-MINI]  88.9,63.12 0 bottom
LOGO6  OSHW-LOGOMINI  [OSHW-LOGO-MINI]  107.19,63.12 0 bottom
LOGO7  OSHW-LOGOMINI  [OSHW-LOGO-MINI]  125.48,63.12 0 bottom
LOGO8  OSHW-LOGOMINI  [OSHW-LOGO-MINI]  15.75,125.35 0 bottom
LOGO9  OSHW-LOGOMINI  [OSHW-LOGO-MINI]  34.04,125.35 0 bottom
LOGO10  OSHW-LOGOMINI  [OSHW-LOGO-MINI]  52.32,125.35 0 bottom
LOGO11  OSHW-LOGOMINI  [OSHW-LOGO-MINI]  70.61,125.35 0 bottom
LOGO12  OSHW-LOGOMINI  [OSHW-LOGO-MINI]  88.9,125.35 0 bottom
LOGO13  OSHW-LOGOMINI  [OSHW-LOGO-MINI]  107.19,125.35 0 bottom
LOGO14  OSHW-LOGOMINI  [OSHW-LOGO-MINI]  125.48,125.35 0 bottom
R1  1k  [0402-TIGHT]  39.75,13.97 270 top
R2  5.1k  [0402-TIGHT]  18.8,19.94 180 top
R3  5.1k  [0402-TIGHT]  12.7,19.94 0 top
R4  1k  [0402-TIGHT]  10.03,13.97 270 top
R5  1k  [0402-TIGHT]  21.46,13.97 270 top
R6  2.2k  [0402-TIGHT]  14.48,28.96 0 top
R7  2.2k  [0402-TIGHT]  14.48,29.97 0 top
R8  1k  [0402-TIGHT]  28.32,13.97 270 top
R9  5.1k  [0402-TIGHT]  37.08,19.94 180 top
R10  5.1k  [0402-TIGHT]  30.99,19.94 0 top
R11  2.2k  [0402-TIGHT]  32.77,28.96 0 top
R12  2.2k  [0402-TIGHT]  32.77,29.97 0 top
R13  1k  [0402-TIGHT]  58.04,13.97 270 top
R14  1k  [0402-TIGHT]  46.61,13.97 270 top
R15  5.1k  [0402-TIGHT]  55.37,19.94 180 top
R16  5.1k  [0402-TIGHT]  49.28,19.94 0 top
R17  2.2k  [0402-TIGHT]  51.05,28.96 0 top
R18  2.2k  [0402-TIGHT]  51.05,29.97 0 top
R19  1k  [0402-TIGHT]  76.33,13.97 270 top
R20  1k  [0402-TIGHT]  64.9,13.97 270 top
R21  5.1k  [0402-TIGHT]  73.66,19.94 180 top
R22  5.1k  [0402-TIGHT]  67.56,19.94 0 top
R23  2.2k  [0402-TIGHT]  69.34,28.96 0 top
R24  2.2k  [0402-TIGHT]  69.34,29.97 0 top
R25  1k  [0402-TIGHT]  94.62,13.97 270 top
R26  1k  [0402-TIGHT]  83.19,13.97 270 top
R27  5.1k  [0402-TIGHT]  91.95,19.94 180 top
R28  5.1k  [0402-TIGHT]  85.85,19.94 0 top
R29  2.2k  [0402-TIGHT]  87.63,28.96 0 top
R30  2.2k  [0402-TIGHT]  87.63,29.97 0 top
R31  1k  [0402-TIGHT]  112.9,13.97 270 top
R32  1k  [0402-TIGHT]  101.47,13.97 270 top
R33  5.1k  [0402-TIGHT]  110.24,19.94 180 top
R34  5.1k  [0402-TIGHT]  104.14,19.94 0 top
R35  2.2k  [0402-TIGHT]  105.92,28.96 0 top
R36  2.2k  [0402-TIGHT]  105.92,29.97 0 top
R37  1k  [0402-TIGHT]  131.19,13.97 270 top
R38  1k  [0402-TIGHT]  119.76,13.97 270 top
R39  5.1k  [0402-TIGHT]  128.52,19.94 180 top
R40  5.1k  [0402-TIGHT]  122.43,19.94 0 top
R41  2.2k  [0402-TIGHT]  124.21,28.96 0 top
R42  2.2k  [0402-TIGHT]  124.21,29.97 0 top
R43  1k  [0402-TIGHT]  21.46,76.2 270 top
R44  1k  [0402-TIGHT]  10.03,76.2 270 top
R45  5.1k  [0402-TIGHT]  18.8,82.17 180 top
R46  5.1k  [0402-TIGHT]  12.7,82.17 0 top
R47  2.2k  [0402-TIGHT]  14.48,91.19 0 top
R48  2.2k  [0402-TIGHT]  14.48,92.2 0 top
R49  1k  [0402-TIGHT]  39.75,76.2 270 top
R50  1k  [0402-TIGHT]  28.32,76.2 270 top
R51  5.1k  [0402-TIGHT]  37.08,82.17 180 top
R52  5.1k  [0402-TIGHT]  30.99,82.17 0 top
R53  2.2k  [0402-TIGHT]  32.77,91.19 0 top
R54  2.2k  [0402-TIGHT]  32.77,92.2 0 top
R55  1k  [0402-TIGHT]  58.04,76.2 270 top
R56  1k  [0402-TIGHT]  46.61,76.2 270 top
R57  5.1k  [0402-TIGHT]  55.37,82.17 180 top
R58  5.1k  [0402-TIGHT]  49.28,82.17 0 top
R59  2.2k  [0402-TIGHT]  51.05,91.19 0 top
R60  2.2k  [0402-TIGHT]  51.05,92.2 0 top
R61  1k  [0402-TIGHT]  76.33,76.2 270 top
R62  1k  [0402-TIGHT]  64.9,76.2 270 top
R63  5.1k  [0402-TIGHT]  73.66,82.17 180 top
R64  5.1k  [0402-TIGHT]  67.56,82.17 0 top
R65  2.2k  [0402-TIGHT]  69.34,91.19 0 top
R66  2.2k  [0402-TIGHT]  69.34,92.2 0 top
R67  1k  [0402-TIGHT]  94.62,76.2 270 top
R68  1k  [0402-TIGHT]  83.19,76.2 270 top
R69  5.1k  [0402-TIGHT]  91.95,82.17 180 top
R70  5.1k  [0402-TIGHT]  85.85,82.17 0 top
R71  2.2k  [0402-TIGHT]  87.63,91.19 0 top
R72  2.2k  [0402-TIGHT]  87.63,92.2 0 top
R73  1k  [0402-TIGHT]  112.9,76.2 270 top
R74  1k  [0402-TIGHT]  101.47,76.2 270 top
R75  5.1k  [0402-TIGHT]  110.24,82.17 180 top
R76  5.1k  [0402-TIGHT]  104.14,82.17 0 top
R77  2.2k  [0402-TIGHT]  105.92,91.19 0 top
R78  2.2k  [0402-TIGHT]  105.92,92.2 0 top
R79  1k  [0402-TIGHT]  131.19,76.2 270 top
R80  1k  [0402-TIGHT]  119.76,76.2 270 top
R81  5.1k  [0402-TIGHT]  128.52,82.17 180 top
R82  5.1k  [0402-TIGHT]  122.43,82.17 0 top
R83  2.2k  [0402-TIGHT]  124.21,91.19 0 top
R84  2.2k  [0402-TIGHT]  124.21,92.2 0 top
S1  SWITCH1  [TACTILE_SWITCH_SMD_5.2MM]  12.57,39.37 270 top
S2  SWITCH1  [TACTILE_SWITCH_SMD_5.2MM]  30.86,39.37 270 top
S3  SWITCH1  [TACTILE_SWITCH_SMD_5.2MM]  49.15,39.37 270 top
S4  SWITCH1  [TACTILE_SWITCH_SMD_5.2MM]  67.44,39.37 270 top
S5  SWITCH1  [TACTILE_SWITCH_SMD_5.2MM]  85.73,39.37 270 top
S6  SWITCH1  [TACTILE_SWITCH_SMD_5.2MM]  104.01,39.37 270 top
S7  SWITCH1  [TACTILE_SWITCH_SMD_5.2MM]  122.3,39.37 270 top
S8  SWITCH1  [TACTILE_SWITCH_SMD_5.2MM]  12.57,101.6 270 top
S9  SWITCH1  [TACTILE_SWITCH_SMD_5.2MM]  30.86,101.6 270 top
S10  SWITCH1  [TACTILE_SWITCH_SMD_5.2MM]  49.15,101.6 270 top
S11  SWITCH1  [TACTILE_SWITCH_SMD_5.2MM]  67.44,101.6 270 top
S12  SWITCH1  [TACTILE_SWITCH_SMD_5.2MM]  85.73,101.6 270 top
S13  SWITCH1  [TACTILE_SWITCH_SMD_5.2MM]  104.01,101.6 270 top
S14  SWITCH1  [TACTILE_SWITCH_SMD_5.2MM]  122.3,101.6 270 top
SPARKX1  SPARKX-LOGO4  [SPARKX-MEDIUM]  34.04,66.17 0 bottom
SPARKX2  SPARKX-LOGO4  [SPARKX-MEDIUM]  15.75,66.17 0 bottom
SPARKX3  SPARKX-LOGO4  [SPARKX-MEDIUM]  52.32,66.17 0 bottom
SPARKX4  SPARKX-LOGO4  [SPARKX-MEDIUM]  70.61,66.17 0 bottom
SPARKX5  SPARKX-LOGO4  [SPARKX-MEDIUM]  88.9,66.17 0 bottom
SPARKX6  SPARKX-LOGO4  [SPARKX-MEDIUM]  107.19,66.17 0 bottom
SPARKX7  SPARKX-LOGO4  [SPARKX-MEDIUM]  125.48,66.17 0 bottom
SPARKX8  SPARKX-LOGO4  [SPARKX-MEDIUM]  15.75,128.4 0 bottom
SPARKX9  SPARKX-LOGO4  [SPARKX-MEDIUM]  34.04,128.4 0 bottom
SPARKX10  SPARKX-LOGO4  [SPARKX-MEDIUM]  52.32,128.4 0 bottom
SPARKX11  SPARKX-LOGO4  [SPARKX-MEDIUM]  70.61,128.4 0 bottom
SPARKX12  SPARKX-LOGO4  [SPARKX-MEDIUM]  88.9,128.4 0 bottom
SPARKX13  SPARKX-LOGO4  [SPARKX-MEDIUM]  107.19,128.4 0 bottom
SPARKX14  SPARKX-LOGO4  [SPARKX-MEDIUM]  125.48,128.4 0 bottom
U1  CH340E  [MSOP10]  15.75,22.23 90 top
U2  CH340E  [MSOP10]  34.04,22.23 90 top
U3  CH340E  [MSOP10]  52.32,22.23 90 top
U4  CH340E  [MSOP10]  70.61,22.23 90 top
U5  CH340E  [MSOP10]  88.9,22.23 90 top
U6  CH340E  [MSOP10]  107.19,22.23 90 top
U7  CH340E  [MSOP10]  125.48,22.23 90 top
U8  CH340E  [MSOP10]  15.75,84.46 90 top
U9  CH340E  [MSOP10]  34.04,84.46 90 top
U10  CH340E  [MSOP10]  52.32,84.46 90 top
U11  CH340E  [MSOP10]  70.61,84.46 90 top
U12  CH340E  [MSOP10]  88.9,84.46 90 top
U13  CH340E  [MSOP10]  107.19,84.46 90 top
U14  CH340E  [MSOP10]  125.48,84.46 90 top
U$1  SNO_MISSING_PINS  [SNO_MISSING_PINS]  15.75,33.02 90 top
U$2  [SNO0]  15.75,60.58 0 bottom
U$3  [SHOE0]  15.75,56.64 0 bottom
U$4  [#0]  12.95,61.98 0 bottom
U$5  [#RESET#0]  16.51,39.37 90 top
U$6  [#I2C#0]  19.3,29.34 90 top
U$7  [#I2C#0]  14.73,29.46 90 bottom
U$8  [#TX#0]  10.16,20.07 90 top
U$9  [#RX#0]  21.34,20.07 90 top
U$10  SNO_MISSING_PINS  [SNO_MISSING_PINS]  34.04,33.02 90 top
U$11  [SNO0]  34.04,60.58 0 bottom
U$12  [SHOE0]  34.04,56.64 0 bottom
U$13  [#0]  31.24,61.98 0 bottom
U$14  [#RESET#0]  34.8,39.37 90 top
U$15  [#I2C#0]  37.59,29.34 90 top
U$16  [#I2C#0]  33.02,29.46 90 bottom
U$17  [#TX#0]  28.45,20.07 90 top
U$18  [#RX#0]  39.62,20.07 90 top
U$19  SNO_MISSING_PINS  [SNO_MISSING_PINS]  52.32,33.02 90 top
U$20  [SNO0]  52.32,60.58 0 bottom
U$21  [SHOE0]  52.32,56.64 0 bottom
U$22  [#0]  49.53,61.98 0 bottom
U$23  [#RESET#0]  53.09,39.37 90 top
U$24  [#I2C#0]  55.88,29.34 90 top
U$25  [#I2C#0]  51.31,29.46 90 bottom
U$26  [#TX#0]  46.74,20.07 90 top
U$27  [#RX#0]  57.91,20.07 90 top
U$28  SNO_MISSING_PINS  [SNO_MISSING_PINS]  70.61,33.02 90 top
U$29  [SNO0]  70.61,60.58 0 bottom
U$30  [SHOE0]  70.61,56.64 0 bottom
U$31  [#0]  67.82,61.98 0 bottom
U$32  [#RESET#0]  71.37,39.37 90 top
U$33  [#I2C#0]  74.17,29.34 90 top
U$34  [#I2C#0]  69.6,29.46 90 bottom
U$35  [#TX#0]  65.02,20.07 90 top
U$36  [#RX#0]  76.2,20.07 90 top
U$37  SNO_MISSING_PINS  [SNO_MISSING_PINS]  88.9,33.02 90 top
U$38  [SNO0]  88.9,60.58 0 bottom
U$39  [SHOE0]  88.9,56.64 0 bottom
U$40  [#0]  86.11,61.98 0 bottom
U$41  [#RESET#0]  89.66,39.37 90 top
U$42  [#I2C#0]  92.46,29.34 90 top
U$43  [#I2C#0]  87.88,29.46 90 bottom
U$44  [#TX#0]  83.31,20.07 90 top
U$45  [#RX#0]  94.49,20.07 90 top
U$46  SNO_MISSING_PINS  [SNO_MISSING_PINS]  107.19,33.02 90 top
U$47  [SNO0]  107.19,60.58 0 bottom
U$48  [SHOE0]  107.19,56.64 0 bottom
U$49  [#0]  104.39,61.98 0 bottom
U$50  [#RESET#0]  107.95,39.37 90 top
U$51  [#I2C#0]  110.74,29.34 90 top
U$52  [#I2C#0]  106.17,29.46 90 bottom
U$53  [#TX#0]  101.6,20.07 90 top
U$54  [#RX#0]  112.78,20.07 90 top
U$55  SNO_MISSING_PINS  [SNO_MISSING_PINS]  125.48,33.02 90 top
U$56  [SNO0]  125.48,60.58 0 bottom
U$57  [SHOE0]  125.48,56.64 0 bottom
U$58  [#0]  122.68,61.98 0 bottom
U$59  [#RESET#0]  126.24,39.37 90 top
U$60  [#I2C#0]  129.03,29.34 90 top
U$61  [#I2C#0]  124.46,29.46 90 bottom
U$62  [#TX#0]  119.89,20.07 90 top
U$63  [#RX#0]  131.06,20.07 90 top
U$64  SNO_MISSING_PINS  [SNO_MISSING_PINS]  15.75,95.25 90 top
U$65  [SNO0]  15.75,122.81 0 bottom
U$66  [SHOE0]  15.75,118.87 0 bottom
U$67  [#0]  12.95,124.21 0 bottom
U$68  [#RESET#0]  16.51,101.6 90 top
U$69  [#I2C#0]  19.3,91.57 90 top
U$70  [#I2C#0]  14.73,91.69 90 bottom
U$71  [#TX#0]  10.16,82.3 90 top
U$72  [#RX#0]  21.34,82.3 90 top
U$73  SNO_MISSING_PINS  [SNO_MISSING_PINS]  34.04,95.25 90 top
U$74  [SNO0]  34.04,122.81 0 bottom
U$75  [SHOE0]  34.04,118.87 0 bottom
U$76  [#0]  31.24,124.21 0 bottom
U$77  [#RESET#0]  34.8,101.6 90 top
U$78  [#I2C#0]  37.59,91.57 90 top
U$79  [#I2C#0]  33.02,91.69 90 bottom
U$80  [#TX#0]  28.45,82.3 90 top
U$81  [#RX#0]  39.62,82.3 90 top
U$82  SNO_MISSING_PINS  [SNO_MISSING_PINS]  52.32,95.25 90 top
U$83  [SNO0]  52.32,122.81 0 bottom
U$84  [SHOE0]  52.32,118.87 0 bottom
U$85  [#0]  49.53,124.21 0 bottom
U$86  [#RESET#0]  53.09,101.6 90 top
U$87  [#I2C#0]  55.88,91.57 90 top
U$88  [#I2C#0]  51.31,91.69 90 bottom
U$89  [#TX#0]  46.74,82.3 90 top
U$90  [#RX#0]  57.91,82.3 90 top
U$91  SNO_MISSING_PINS  [SNO_MISSING_PINS]  70.61,95.25 90 top
U$92  [SNO0]  70.61,122.81 0 bottom
U$93  [SHOE0]  70.61,118.87 0 bottom
U$94  [#0]  67.82,124.21 0 bottom
U$95  [#RESET#0]  71.37,101.6 90 top
U$96  [#I2C#0]  74.17,91.57 90 top
U$97  [#I2C#0]  69.6,91.69 90 bottom
U$98  [#TX#0]  65.02,82.3 90 top
U$99  [#RX#0]  76.2,82.3 90 top
U$100  SNO_MISSING_PINS  [SNO_MISSING_PINS]  88.9,95.25 90 top
U$101  [SNO0]  88.9,122.81 0 bottom
U$102  [SHOE0]  88.9,118.87 0 bottom
U$103  [#0]  86.11,124.21 0 bottom
U$104  [#RESET#0]  89.66,101.6 90 top
U$105  [#I2C#0]  92.46,91.57 90 top
U$106  [#I2C#0]  87.88,91.69 90 bottom
U$107  [#TX#0]  83.31,82.3 90 top
U$108  [#RX#0]  94.49,82.3 90 top
U$109  SNO_MISSING_PINS  [SNO_MISSING_PINS]  107.19,95.25 90 top
U$110  [SNO0]  107.19,122.81 0 bottom
U$111  [SHOE0]  107.19,118.87 0 bottom
U$112  [#0]  104.39,124.21 0 bottom
U$113  [#RESET#0]  107.95,101.6 90 top
U$114  [#I2C#0]  110.74,91.57 90 top
U$115  [#I2C#0]  106.17,91.69 90 bottom
U$116  [#TX#0]  101.6,82.3 90 top
U$117  [#RX#0]  112.78,82.3 90 top
U$118  SNO_MISSING_PINS  [SNO_MISSING_PINS]  125.48,95.25 90 top
U$119  [SNO0]  125.48,122.81 0 bottom
U$120  [SHOE0]  125.48,118.87 0 bottom
U$121  [#0]  122.68,124.21 0 bottom
U$122  [#RESET#0]  126.24,101.6 90 top
U$123  [#I2C#0]  129.03,91.57 90 top
U$124  [#I2C#0]  124.46,91.69 90 bottom
U$125  [#TX#0]  119.89,82.3 90 top
U$126  [#RX#0]  131.06,82.3 90 top

## Library data of the parts
C1 C16 C30 C44 C58 C72 C86 C100 C114 C128 C142 C156 C170 C184 = SparkFun-Capacitors; PROD_ID: CAP-12416
C2 C15 C29 C43 C57 C71 C85 C99 C113 C127 C141 C155 C169 C183 = SparkFun-Capacitors; PROD_ID: CAP-14847
C3 C17 C31 C45 C59 C73 C87 C101 C115 C129 C143 C157 C171 C185 = SparkFun-Capacitors; PROD_ID: CAP-14848
C4 C18 C32 C46 C60 C74 C88 C102 C116 C130 C144 C158 C172 C186 = SparkFun-Capacitors; PROD_ID: CAP-11330
C5-C14 C19-C28 C33-C42 C47-C56 C61-C70 C75-C84 C89-C98 C103-C112 C117-C126 C131-C140 C145-C154 C159-C168 C173-C182 C187-C196 = SparkFun-Capacitors; PROD_ID: CAP-15083
D1 D4 D6 D8 D10 D12 D14 D16 D18 D20 D22 D24 D26 D28 = SparkFun-LED; PROD_ID: DIO-00821
D2 D3 D5 D7 D9 D11 D13 D15 D17 D19 D21 D23 D25 D27 = SparkFun-LED; PROD_ID: DIO-09003
E$1-E$4 FD1-FD56 LOGO1-LOGO14 = SparkFun-Aesthetics
E$5 = SparkFun-Retired
J1 J4 J8 J11 J14 J17 J20 J23 J26 J29 J32 J35 J38 J41 = SparkFun-Connectors; PROD_ID: CONN-13694
J2 J6 J9 J12 J15 J18 J21 J24 J27 J30 J33 J36 J39 J42 = New_Parts; DESCRIPTION: 1.0 HDMI R/A HEADER ASSY (I/M TYPE); MANUFACTURER_NAME: Molex; MANUFACTURER_PART_NUMBER: 208658-1051; MOUSER_PART_NUMBER: 538-208658-1051; MOUSER_PRICE-STOCK: https://www.mouser.co.uk/ProductDetail/Molex/208658-1051?qs=BJlw7L4Cy7%252Bu27sIkZU3Xw%3D%3D
J3 J5 J7 J10 J13 J16 J19 J22 J25 J28 J31 J34 J37 J40 = SparkFun-Connectors; PROD_ID: CONN-14122
JP1-JP42 = SparkFun-Jumpers
R1 R4 R5 R8 R13 R14 R19 R20 R25 R26 R31 R32 R37 R38 R43 R44 R49 R50 R55 R56 R61 R62 R67 R68 R73 R74 R79 R80 = SparkFun-Resistors; PROD_ID: RES-14342
R2 R3 R9 R10 R15 R16 R21 R22 R27 R28 R33 R34 R39 R40 R45 R46 R51 R52 R57 R58 R63 R64 R69 R70 R75 R76 R81 R82 = SparkFun-Resistors; PROD_ID: RES-14340
R6 R7 R11 R12 R17 R18 R23 R24 R29 R30 R35 R36 R41 R42 R47 R48 R53 R54 R59 R60 R65 R66 R71 R72 R77 R78 R83 R84 = SparkFun-Resistors; PROD_ID: RES-14341
S1-S14 = SparkFun-Switches; PROD_ID: SWCH-14139
SPARKX1-SPARKX14 = SparkX
U1-U14 = SparkFun-IC-Comms; PROD_ID: IC-14135
U$1 U$10 U$19 U$28 U$37 U$46 U$55 U$64 U$73 U$82 U$91 U$100 U$109 U$118 = New_Parts
U$2-U$9 U$11-U$18 U$20-U$27 U$29-U$36 U$38-U$45 U$47-U$54 U$56-U$63 U$65-U$72 U$74-U$81 U$83-U$90 U$92-U$99 U$101-U$108 U$110-U$117 U$119-U$126 = output